# Altium PCB TX_Board.PcbDoc (part 2 of 5)
Units mm, origin at the board's own origin, x right, y up, seen from the top; angles counter-clockwise.
Board outline 69 x 69 mm, 4 copper layers (Top Layer, Int1 (GND), Int2 (GND), Bottom Layer), stack 1.591 mm thick; 102 components, 48 nets, 289 pads, 82 vias.
Unrouted connection lines stored in the file: 40.
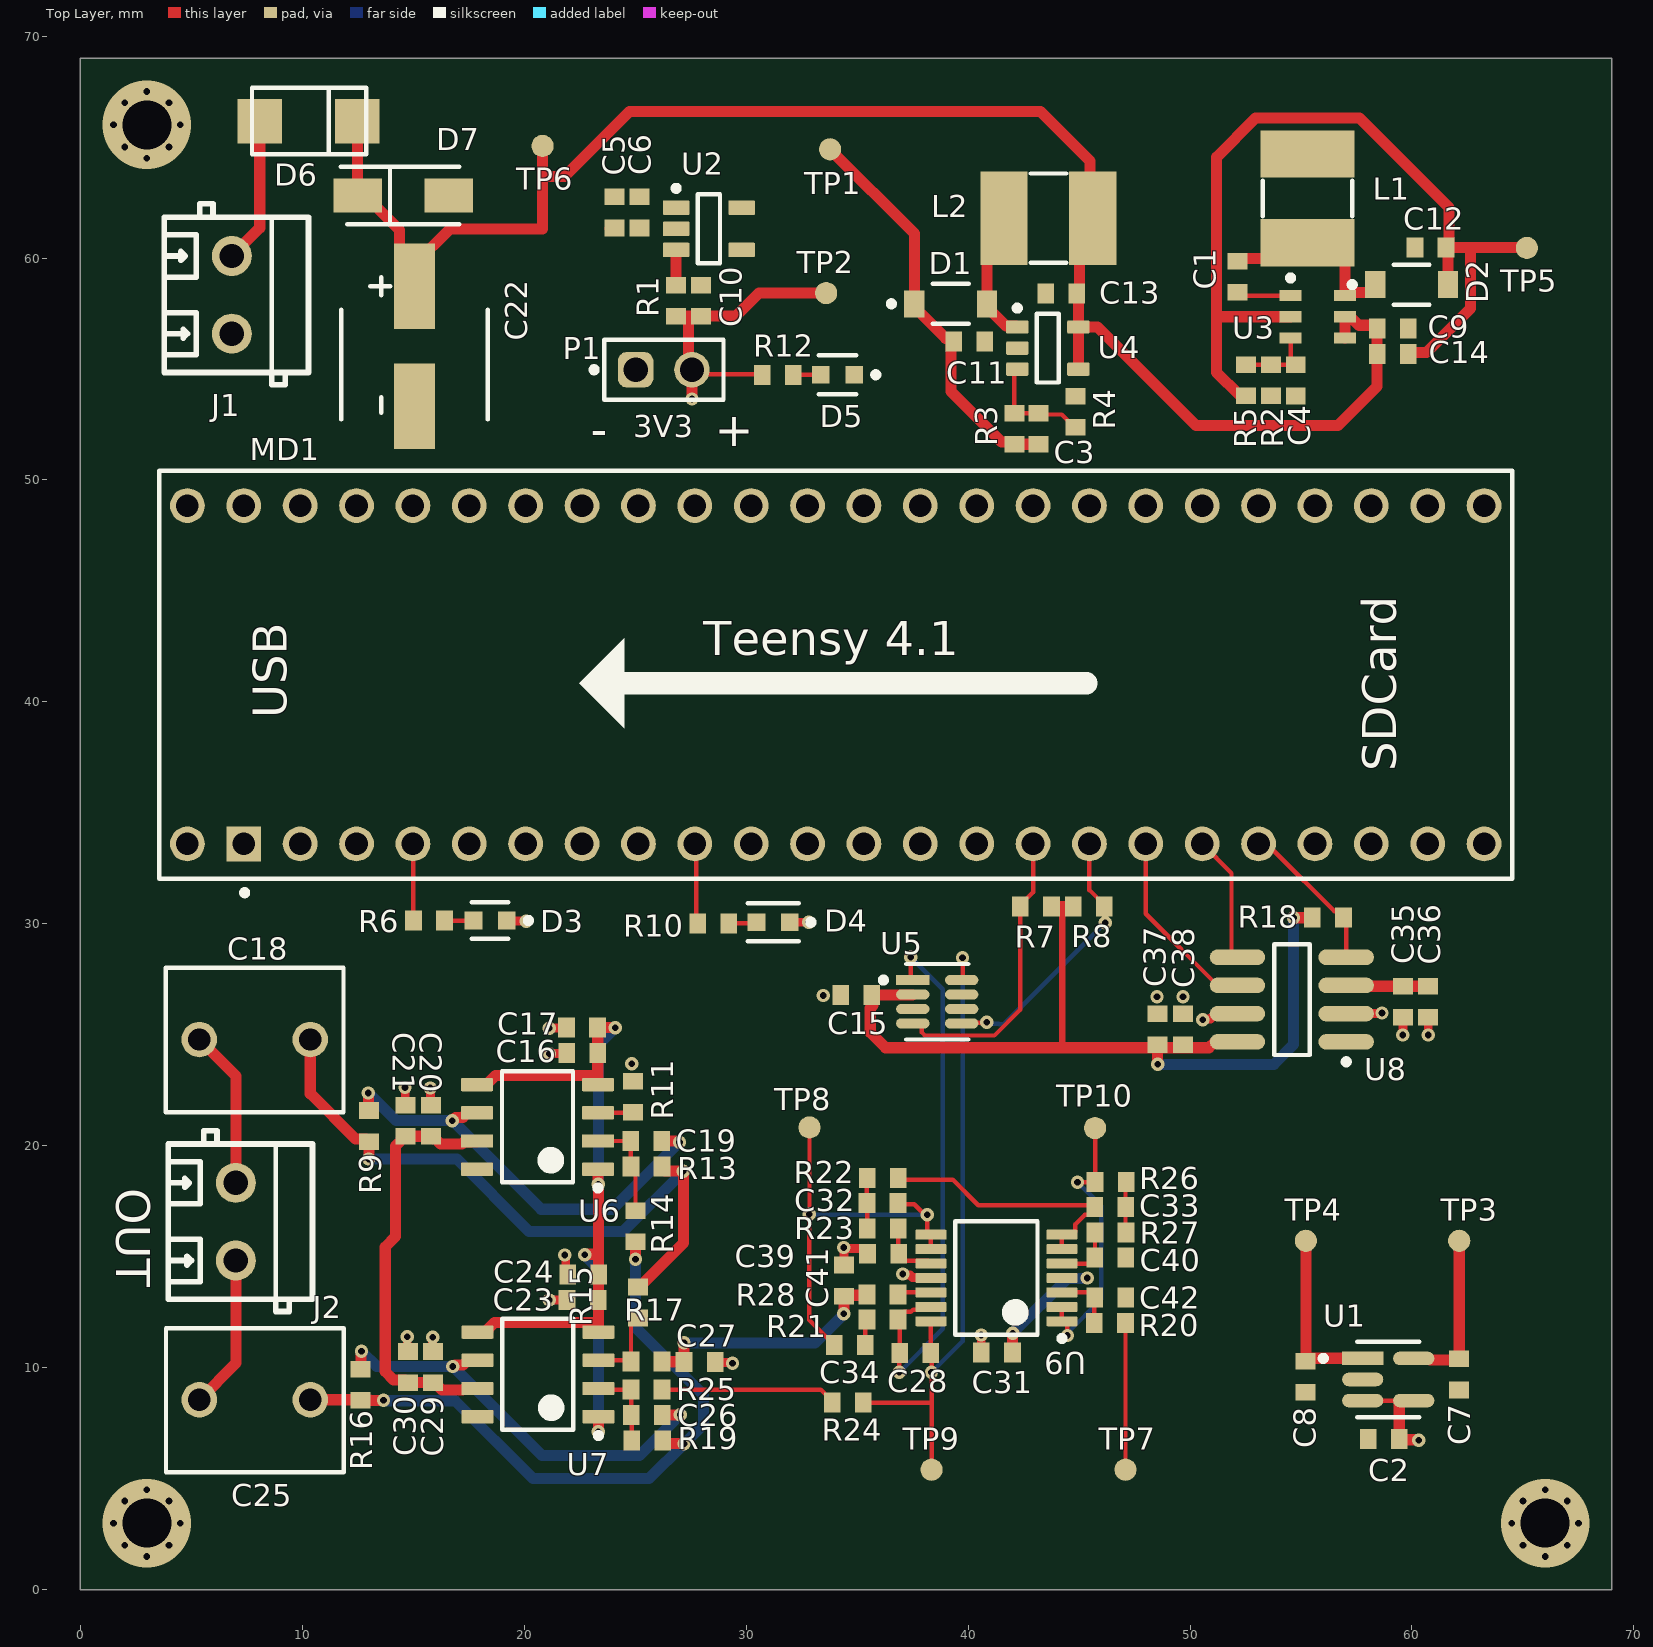
[diagram p0: Top Layer view]

## Part data (continued)
C19 C28: library part CC0603FRNPO9BN100, "50V 10pF NP0 ±1% 0603 Multilayer Ceramic Capacitors MLCC - SMD/SMT ROHS", Case Code (Imperial)=0603, Case Code (Metric)=1608, Dielectric=C0G, Dielectric Material=Ceramic, JLCPCB Part Number=C309467, Manufacturer="Yageo Group", Max Operating Temperature=125°C, Min Operating Temperature=-55°C, Temperature Coefficient=30ppm/°C, Tolerance=1%, Voltage Rating=50V, Case/Package=0603, Category="Ceramic Capacitors", China RoHS=Compliant, ComponentLink1Description=https://datasheet.octopart.com:443/CC0603FRNPO9BN100-Yageo-datasheet-182140217.pdf?src-supplier=IHS, ComponentLink1URL=https://datasheet.octopart.com:443/CC0603FRNPO9BN100-Yageo-datasheet-182140217.pdf?src-supplier=IHS, ComponentLink2Description=https://datasheet.octopart.com:443/CC0603FRNPO9BN100-Yageo-datasheet-151948684.pdf?src-supplier=element14+APAC, ComponentLink2URL=https://datasheet.octopart.com:443/CC0603FRNPO9BN100-Yageo-datasheet-151948684.pdf?src-supplier=element14+APAC, ComponentLink3Description=https://datasheet.octopart.com:443/CC0603FRNPO9BN100-Yageo-datasheet-65873193.pdf?src-supplier=element14+APAC, ComponentLink3URL=https://datasheet.octopart.com:443/CC0603FRNPO9BN100-Yageo-datasheet-65873193.pdf?src-supplier=element14+APAC, ComponentLink4Description=https://datasheet.octopart.com:443/CC0603FRNPO9BN100-Yageo-datasheet-10406438.pdf?src-supplier=Newark, ComponentLink4URL=https://datasheet.octopart.com:443/CC0603FRNPO9BN100-Yageo-datasheet-10406438.pdf?src-supplier=Newark, ComponentLink5Description=https://datasheet.octopart.com:443/CC0603FRNPO9BN100-Yageo-datasheet-181967871.pdf?src-supplier=Farnell, ComponentLink5URL=https://datasheet.octopart.com:443/CC0603FRNPO9BN100-Yageo-datasheet-181967871.pdf?src-supplier=Farnell, ComponentLink6Description=https://datasheet.octopart.com:443/CC0603FRNPO9BN100-Yageo-Group-datasheet-188689597.pdf?src-supplier=Farnell, ComponentLink6URL=https://datasheet.octopart.com:443/CC0603FRNPO9BN100-Yageo-Group-datasheet-188689597.pdf?src-supplier=Farnell, ComponentLink7Description=https://datasheet.octopart.com:443/CC0603FRNPO9BN100-Yageo-Group-datasheet-188129580.pdf?src-supplier=LCSC, ComponentLink7URL=https://datasheet.octopart.com:443/CC0603FRNPO9BN100-Yageo-Group-datasheet-188129580.pdf?src-supplier=LCSC, ComponentLink8Description=https://datasheet.octopart.com:443/CC0603FRNPO9BN100-Yageo-datasheet-137875056.pdf?src-supplier=Future+Electronics, ComponentLink8URL=https://datasheet.octopart.com:443/CC0603FRNPO9BN100-Yageo-datasheet-137875056.pdf?src-supplier=Future+Electronics, ComponentLink9Description=https://datasheet.octopart.com:443/CC0603FRNPO9BN100-Yageo-datasheet-136957424.pdf?src-supplier=Future+Electronics, ComponentLink9URL=https://datasheet.octopart.com:443/CC0603FRNPO9BN100-Yageo-datasheet-136957424.pdf?src-supplier=Future+Electronics, ComponentLink10Description=https://datasheet.octopart.com:443/CC0603FRNPO9BN100-Yageo-datasheet-137700082.pdf?src-supplier=Future+Electronics, ComponentLink10URL=https://datasheet.octopart.com:443/CC0603FRNPO9BN100-Yageo-datasheet-137700082.pdf?src-supplier=Future+Electronics, ComponentLink11Description=https://datasheet.octopart.com:443/CC0603FRNPO9BN100-Yageo-datasheet-78855684.pdf?src-supplier=Future+Electronics, ComponentLink11URL=https://datasheet.octopart.com:443/CC0603FRNPO9BN100-Yageo-datasheet-78855684.pdf?src-supplier=Future+Electronics, ComponentLink12Description=https://datasheet.octopart.com:443/CC0603FRNPO9BN100-Yageo-datasheet-16730043.pdf?src-supplier=Future+Electronics, ComponentLink12URL=https://datasheet.octopart.com:443/CC0603FRNPO9BN100-Yageo-datasheet-16730043.pdf?src-supplier=Future+Electronics, ComponentLink13Description=https://datasheet.octopart.com:443/CC0603FRNPO9BN100-Yageo-datasheet-15895757.pdf?src-supplier=Future+Electronics, ComponentLink13URL=https://datasheet.octopart.com:443/CC0603FRNPO9BN100-Yageo-datasheet-15895757.pdf?src-supplier=Future+Electronics, ComponentLink14Description=https://datasheet.octopart.com:443/CC0603FRNPO9BN100-Yageo-datasheet-12589826.pdf?src-supplier=Future+Electronics, ComponentLink14URL=https://datasheet.octopart.com:443/CC0603FRNPO9BN100-Yageo-datasheet-12589826.pdf?src-supplier=Future+Electronics, ComponentLink15Description=http://sigma.octopart.com:80/conflict_mineral_statement/Yageo-company-3.pdf?src-supplier=Compliance+Statements, ComponentLink15URL=http://sigma.octopart.com:80/conflict_mineral_statement/Yageo-company-3.pdf?src-supplier=Compliance+Statements, ComponentLink16Description=http://sigma.octopart.com:80/rohs_statement/Yageo-company-2.pdf?src-supplier=Compliance+Statements, ComponentLink16URL=http://sigma.octopart.com:80/rohs_statement/Yageo-company-2.pdf?src-supplier=Compliance+Statements, Composition=Ceramic, Depth=800µm, Dissipation Factor=1%, Halogen Free="Halogen Free", Height=800µm, Lead Free="Lead Free", Length=1.6mm, Lifecycle Status=Production, Manufacturer Part Number=CC0603FRNPO9BN100, Mounting Technology="Surface Mount", Number of Terminals=2, Packaging="Tape and Reel", Pins=2, Pricing="10=0.073, 11=0.0481, 20=0.072, 30=0.071, 50=0.069, 100=0.068, 101=0.0348, 250=0.055, 500=0.042, 501=0.03, 1000=0.038, 1001=0.0264 (USD)", Radiation Hardening=No, REACH SVHC=Unaffected, RoHS=Compliant, Schedule B="8532240020, 8532240020|8532240020|8532240020|8532240020|8532240020", Stock=69258, Supplier=Newark, Supplier Part Number=CC0603FRNPO9BN100, Termination=SMD/SMT, Thickness=889µm, Voltage Rating (DC)=50V, Width=800µm
C22: library part RVT1E101M0607, "Capacitor Polarised", JLCPCB Part Number=C72477, Manufacturer_Name=ROQANG, Datasheet Link=https://jlcpcb.com/partdetail/ROQANG-RVT1E101M0607/C72477, Height=8mm, Manufacturer_Part_Number=RVT1E101M0607
C26: library part CC0603CRNPO9BN4R7, "Surface Mount Ceramic Multilayer Capacitor 4.7pF 0.25pF C0G 50V 0603 Paper T/R", Case Code (Imperial)=0603, Case Code (Metric)=1608, Dielectric=C0G, Dielectric Material=Ceramic, Insulation Resistance=100GΩ, JLCPCB Part Number=C282071, Manufacturer="Yageo Group", Max Operating Temperature=125°C, Min Operating Temperature=-55°C, Temperature Coefficient=30ppm/°C, Voltage=50V, Case/Package=0603, Category="Ceramic Capacitors", China RoHS=Compliant, ComponentLink1Description=https://datasheet.octopart.com:443/CC0603CRNPO9BN4R7-Yageo-datasheet-182140217.pdf?src-supplier=IHS, ComponentLink1URL=https://datasheet.octopart.com:443/CC0603CRNPO9BN4R7-Yageo-datasheet-182140217.pdf?src-supplier=IHS, ComponentLink2Description=https://datasheet.octopart.com:443/CC0603CRNPO9BN4R7-Yageo-Group-datasheet-192360829.pdf?src-supplier=Future+Electronics, ComponentLink2URL=https://datasheet.octopart.com:443/CC0603CRNPO9BN4R7-Yageo-Group-datasheet-192360829.pdf?src-supplier=Future+Electronics, ComponentLink3Description=https://datasheet.octopart.com:443/CC0603CRNPO9BN4R7-Yageo-datasheet-5321569.pdf?src-supplier=Future+Electronics, ComponentLink3URL=https://datasheet.octopart.com:443/CC0603CRNPO9BN4R7-Yageo-datasheet-5321569.pdf?src-supplier=Future+Electronics, ComponentLink4Description=https://datasheet.octopart.com:443/CC0603CRNPO9BN4R7-Yageo-datasheet-137875056.pdf?src-supplier=Future+Electronics, ComponentLink4URL=https://datasheet.octopart.com:443/CC0603CRNPO9BN4R7-Yageo-datasheet-137875056.pdf?src-supplier=Future+Electronics, ComponentLink5Description=https://datasheet.octopart.com:443/CC0603CRNPO9BN4R7-Yageo-datasheet-136957424.pdf?src-supplier=Future+Electronics, ComponentLink5URL=https://datasheet.octopart.com:443/CC0603CRNPO9BN4R7-Yageo-datasheet-136957424.pdf?src-supplier=Future+Electronics, ComponentLink6Description=https://datasheet.octopart.com:443/CC0603CRNPO9BN4R7-Yageo-datasheet-137700082.pdf?src-supplier=Future+Electronics, ComponentLink6URL=https://datasheet.octopart.com:443/CC0603CRNPO9BN4R7-Yageo-datasheet-137700082.pdf?src-supplier=Future+Electronics, ComponentLink7Description=https://datasheet.octopart.com:443/CC0603CRNPO9BN4R7-Yageo-datasheet-78855684.pdf?src-supplier=Future+Electronics, ComponentLink7URL=https://datasheet.octopart.com:443/CC0603CRNPO9BN4R7-Yageo-datasheet-78855684.pdf?src-supplier=Future+Electronics, ComponentLink8Description=https://datasheet.octopart.com:443/CC0603CRNPO9BN4R7-Yageo-datasheet-62091628.pdf?src-supplier=Future+Electronics, ComponentLink8URL=https://datasheet.octopart.com:443/CC0603CRNPO9BN4R7-Yageo-datasheet-62091628.pdf?src-supplier=Future+Electronics, ComponentLink9Description=https://datasheet.octopart.com:443/CC0603CRNPO9BN4R7-Yageo-datasheet-24578986.pdf?src-supplier=Future+Electronics, ComponentLink9URL=https://datasheet.octopart.com:443/CC0603CRNPO9BN4R7-Yageo-datasheet-24578986.pdf?src-supplier=Future+Electronics, ComponentLink10Description=https://datasheet.octopart.com:443/CC0603CRNPO9BN4R7-Yageo-datasheet-16730043.pdf?src-supplier=Future+Electronics, ComponentLink10URL=https://datasheet.octopart.com:443/CC0603CRNPO9BN4R7-Yageo-datasheet-16730043.pdf?src-supplier=Future+Electronics, ComponentLink11Description=https://datasheet.octopart.com:443/CC0603CRNPO9BN4R7-Yageo-datasheet-15895757.pdf?src-supplier=Future+Electronics, ComponentLink11URL=https://datasheet.octopart.com:443/CC0603CRNPO9BN4R7-Yageo-datasheet-15895757.pdf?src-supplier=Future+Electronics, ComponentLink12Description=https://datasheet.octopart.com:443/CC0603CRNPO9BN4R7-Yageo-datasheet-12589826.pdf?src-supplier=Future+Electronics, ComponentLink12URL=https://datasheet.octopart.com:443/CC0603CRNPO9BN4R7-Yageo-datasheet-12589826.pdf?src-supplier=Future+Electronics, ComponentLink13Description=https://datasheet.octopart.com:443/CC0603CRNPO9BN4R7-Yageo-datasheet-8817079.pdf?src-supplier=Future+Electronics, ComponentLink13URL=https://datasheet.octopart.com:443/CC0603CRNPO9BN4R7-Yageo-datasheet-8817079.pdf?src-supplier=Future+Electronics, ComponentLink14Description=https://datasheet.octopart.com:443/CC0603CRNPO9BN4R7-Yageo-datasheet-8324240.pdf?src-supplier=Future+Electronics, ComponentLink14URL=https://datasheet.octopart.com:443/CC0603CRNPO9BN4R7-Yageo-datasheet-8324240.pdf?src-supplier=Future+Electronics, ComponentLink15Description=https://datasheet.octopart.com:443/CC0603CRNPO9BN4R7-Yageo-datasheet-504625.pdf?src-supplier=Future+Electronics, ComponentLink15URL=https://datasheet.octopart.com:443/CC0603CRNPO9BN4R7-Yageo-datasheet-504625.pdf?src-supplier=Future+Electronics, ComponentLink16Description=https://datasheet.octopart.com:443/CC0603CRNPO9BN4R7-Yageo-datasheet-10406438.pdf?src-supplier=element14+APAC, ComponentLink16URL=https://datasheet.octopart.com:443/CC0603CRNPO9BN4R7-Yageo-datasheet-10406438.pdf?src-supplier=element14+APAC, ComponentLink17Description=https://datasheet.octopart.com:443/CC0603CRNPO9BN4R7-Yageo-datasheet-65873193.pdf?src-supplier=element14+APAC, ComponentLink17URL=https://datasheet.octopart.com:443/CC0603CRNPO9BN4R7-Yageo-datasheet-65873193.pdf?src-supplier=element14+APAC, ComponentLink18Description=https://datasheet.octopart.com:443/CC0603CRNPO9BN4R7-Yageo-datasheet-181967803.pdf?src-supplier=Newark, ComponentLink18URL=https://datasheet.octopart.com:443/CC0603CRNPO9BN4R7-Yageo-datasheet-181967803.pdf?src-supplier=Newark, ComponentLink19Description=https://datasheet.octopart.com:443/CC0603CRNPO9BN4R7-Yageo-datasheet-151948684.pdf?src-supplier=Newark, ComponentLink19URL=https://datasheet.octopart.com:443/CC0603CRNPO9BN4R7-Yageo-datasheet-151948684.pdf?src-supplier=Newark, ComponentLink20Description=https://datasheet.octopart.com:443/CC0603CRNPO9BN4R7-Yageo-datasheet-67645495.pdf?src-supplier=Newark, ComponentLink20URL=https://datasheet.octopart.com:443/CC0603CRNPO9BN4R7-Yageo-datasheet-67645495.pdf?src-supplier=Newark, ComponentLink21Description=https://datasheet.octopart.com:443/CC0603CRNPO9BN4R7-Yageo-Group-datasheet-188129580.pdf?src-supplier=LCSC, ComponentLink21URL=https://datasheet.octopart.com:443/CC0603CRNPO9BN4R7-Yageo-Group-datasheet-188129580.pdf?src-supplier=LCSC, ComponentLink22Description=https://datasheet.octopart.com:443/CC0603CRNPO9BN4R7-Yageo-datasheet-10621397.pdf?src-supplier=Farnell, ComponentLink22URL=https://datasheet.octopart.com:443/CC0603CRNPO9BN4R7-Yageo-datasheet-10621397.pdf?src-supplier=Farnell, ComponentLink23Description=https://datasheet.octopart.com:443/CC0603CRNPO9BN4R7-Yageo-datasheet-8643175.pdf?src-supplier=SOS+electronic, ComponentLink23URL=https://datasheet.octopart.com:443/CC0603CRNPO9BN4R7-Yageo-datasheet-8643175.pdf?src-supplier=SOS+electronic, ComponentLink24Description=http://sigma.octopart.com:80/conflict_mineral_statement/Yageo-company-3.pdf?src-supplier=Compliance+Statements, ComponentLink24URL=http://sigma.octopart.com:80/conflict_mineral_statement/Yageo-company-3.pdf?src-supplier=Compliance+Statements, ComponentLink25Description=http://sigma.octopart.com:80/rohs_statement/Yageo-company-2.pdf?src-supplier=Compliance+Statements, ComponentLink25URL=http://sigma.octopart.com:80/rohs_statement/Yageo-company-2.pdf?src-supplier=Compliance+Statements, Composition=Ceramic, Country of Origin="Mainland China, Taiwan", Depth=800µm, Export Control Classification Number (ECCN) Code=EAR99, Halogen Free="Halogen Free", Harmonized Tariff Schedule (HTS) Code=8532.24.00.20, Height=800µm, Introduction Date=2009-04-16, Lead Free="Lead Free", Length=1.6mm, Lifecycle Status=Production, Manufacturer Part Number=CC0603CRNPO9BN4R7, Mounting Technology="Surface Mount", Number of Terminals=2, Packaging="Cut Tape", Pins=2, Pricing="4000=0.00724 (USD)", Radiation Hardening=No, REACH SVHC=Unaffected, RoHS=Compliant, Schedule B="8532240020, 8532240020|8532240020, 8532240020|8532240020|8532240020, 8532240020|8532240020|8532240020|8532240020", Stock=4000, Supplier=Avnet, Supplier Part Number=CC0603CRNPO9BN4R7, Termination=SMD/SMT, Thickness=889µm, Voltage Rating=50V, Voltage Rating (AC)=50V, Voltage Rating (DC)=50V, Weight=2.012816mg, Width=800µm
C32 C33: library part CC0603FRNPO9BN471, "50V 470pF NP0 ±1% 0603 Multilayer Ceramic Capacitors MLCC - SMD/SMT ROHS", Case Code (Imperial)=0603, Case Code (Metric)=1608, Dielectric=C0G, Dielectric Material=Ceramic, Insulation Resistance=10GΩ, JLCPCB Part Number=C519564, Manufacturer="Yageo Group", Max Operating Temperature=125°C, Min Operating Temperature=-55°C, Tolerance=1%, Voltage Rating=50V, Case/Package=0603, Category="Ceramic Capacitors", China RoHS=Compliant, ComponentLink1Description=https://datasheet.octopart.com:443/CC0603FRNPO9BN471-Yageo-datasheet-182140217.pdf?src-supplier=IHS, ComponentLink1URL=https://datasheet.octopart.com:443/CC0603FRNPO9BN471-Yageo-datasheet-182140217.pdf?src-supplier=IHS, ComponentLink2Description=https://datasheet.octopart.com:443/CC0603FRNPO9BN471-Yageo-datasheet-151948684.pdf?src-supplier=HQonline, ComponentLink2URL=https://datasheet.octopart.com:443/CC0603FRNPO9BN471-Yageo-datasheet-151948684.pdf?src-supplier=HQonline, ComponentLink3Description=https://datasheet.octopart.com:443/CC0603FRNPO9BN471-Yageo-datasheet-182029577.pdf?src-supplier=Newark, ComponentLink3URL=https://datasheet.octopart.com:443/CC0603FRNPO9BN471-Yageo-datasheet-182029577.pdf?src-supplier=Newark, ComponentLink4Description=https://datasheet.octopart.com:443/CC0603FRNPO9BN471-Yageo-datasheet-182029576.pdf?src-supplier=Newark, ComponentLink4URL=https://datasheet.octopart.com:443/CC0603FRNPO9BN471-Yageo-datasheet-182029576.pdf?src-supplier=Newark, ComponentLink5Description=https://datasheet.octopart.com:443/CC0603FRNPO9BN471-Yageo-Group-datasheet-188129580.pdf?src-supplier=LCSC, ComponentLink5URL=https://datasheet.octopart.com:443/CC0603FRNPO9BN471-Yageo-Group-datasheet-188129580.pdf?src-supplier=LCSC, ComponentLink6Description=https://datasheet.octopart.com:443/CC0603FRNPO9BN471-Yageo-datasheet-137875056.pdf?src-supplier=Future+Electronics, ComponentLink6URL=https://datasheet.octopart.com:443/CC0603FRNPO9BN471-Yageo-datasheet-137875056.pdf?src-supplier=Future+Electronics, ComponentLink7Description=https://datasheet.octopart.com:443/CC0603FRNPO9BN471-Yageo-datasheet-136957424.pdf?src-supplier=Future+Electronics, ComponentLink7URL=https://datasheet.octopart.com:443/CC0603FRNPO9BN471-Yageo-datasheet-136957424.pdf?src-supplier=Future+Electronics, ComponentLink8Description=https://datasheet.octopart.com:443/CC0603FRNPO9BN471-Yageo-datasheet-137700082.pdf?src-supplier=Future+Electronics, ComponentLink8URL=https://datasheet.octopart.com:443/CC0603FRNPO9BN471-Yageo-datasheet-137700082.pdf?src-supplier=Future+Electronics, ComponentLink9Description=https://datasheet.octopart.com:443/CC0603FRNPO9BN471-Yageo-datasheet-78855684.pdf?src-supplier=Future+Electronics, ComponentLink9URL=https://datasheet.octopart.com:443/CC0603FRNPO9BN471-Yageo-datasheet-78855684.pdf?src-supplier=Future+Electronics, ComponentLink10Description=https://datasheet.octopart.com:443/CC0603FRNPO9BN471-Yageo-datasheet-16730043.pdf?src-supplier=Future+Electronics, ComponentLink10URL=https://datasheet.octopart.com:443/CC0603FRNPO9BN471-Yageo-datasheet-16730043.pdf?src-supplier=Future+Electronics, ComponentLink11Description=https://datasheet.octopart.com:443/CC0603FRNPO9BN471-Yageo-datasheet-15895757.pdf?src-supplier=Future+Electronics, ComponentLink11URL=https://datasheet.octopart.com:443/CC0603FRNPO9BN471-Yageo-datasheet-15895757.pdf?src-supplier=Future+Electronics, ComponentLink12Description=https://datasheet.octopart.com:443/CC0603FRNPO9BN471-Yageo-datasheet-12589826.pdf?src-supplier=Future+Electronics, ComponentLink12URL=https://datasheet.octopart.com:443/CC0603FRNPO9BN471-Yageo-datasheet-12589826.pdf?src-supplier=Future+Electronics, ComponentLink13Description=https://datasheet.octopart.com:443/CC0603FRNPO9BN471-Yageo-datasheet-10406438.pdf?src-supplier=Future+Electronics, ComponentLink13URL=https://datasheet.octopart.com:443/CC0603FRNPO9BN471-Yageo-datasheet-10406438.pdf?src-supplier=Future+Electronics, ComponentLink14Description=http://sigma.octopart.com:80/conflict_mineral_statement/Yageo-company-3.pdf?src-supplier=Compliance+Statements, ComponentLink14URL=http://sigma.octopart.com:80/conflict_mineral_statement/Yageo-company-3.pdf?src-supplier=Compliance+Statements, ComponentLink15Description=http://sigma.octopart.com:80/rohs_statement/Yageo-company-2.pdf?src-supplier=Compliance+Statements, ComponentLink15URL=http://sigma.octopart.com:80/rohs_statement/Yageo-company-2.pdf?src-supplier=Compliance+Statements, Composition=Ceramic, Depth=800µm, Dissipation Factor=0.1%, Halogen Free="Halogen Free", Height=800µm, Lead Free="Lead Free", Length=1.6mm, Lifecycle Status=Production, Manufacturer Part Number=CC0603FRNPO9BN471, Mounting Technology="Surface Mount", Number of Terminals=2, Packaging="Tape and Reel", Pricing="1=0.0986, 11=0.0703, 101=0.0582, 501=0.0554, 1001=0.0547 (USD)", Radiation Hardening=No, REACH SVHC=Unaffected, RoHS=Compliant, Schedule B="8532240020, 8532240020|8532240020, 8532240020|8532240020|8532240020, 8532240020|8532240020|8532240020|8532240020", Stock=7080, Supplier=Newark, Supplier Part Number=CC0603FRNPO9BN471, Termination=SMD/SMT, Thickness=889µm, Voltage Rating (DC)=50V, Width=800µm
C34: library part CC0603JRX7R9BB103, "Surface Mount Ceramic Multilayer Capacitor 0.01uF 5% X7R 50V 0603 Paper T/R", Case Code (Imperial)=0603, Case Code (Metric)=1608, Dielectric=X7R, Dielectric Material=Ceramic, JLCPCB Part Number=C115056, Manufacturer="Yageo Group", Max Operating Temperature=125°C, Min Operating Temperature=-55°C, Tolerance=5%, Voltage Rating=50V, Case/Package=0603, Category="Ceramic Capacitors", China RoHS=Compliant, ComponentLink1Description=https://datasheet.octopart.com:443/CC0603JRX7R9BB103-Yageo-datasheet-177165144.pdf?src-supplier=IHS, ComponentLink1URL=https://datasheet.octopart.com:443/CC0603JRX7R9BB103-Yageo-datasheet-177165144.pdf?src-supplier=IHS, ComponentLink2Description=https://datasheet.octopart.com/CC0603JRX7R9BB103-Yageo-datasheet-10883670.pdf, ComponentLink2URL=https://datasheet.octopart.com/CC0603JRX7R9BB103-Yageo-datasheet-10883670.pdf, ComponentLink3Description=https://datasheet.octopart.com:443/CC0603JRX7R9BB103-Yageo-datasheet-147453679.pdf?src-supplier=Newark, ComponentLink3URL=https://datasheet.octopart.com:443/CC0603JRX7R9BB103-Yageo-datasheet-147453679.pdf?src-supplier=Newark, ComponentLink4Description=https://datasheet.octopart.com:443/CC0603JRX7R9BB103-Yageo-datasheet-140260305.pdf?src-supplier=Farnell, ComponentLink4URL=https://datasheet.octopart.com:443/CC0603JRX7R9BB103-Yageo-datasheet-140260305.pdf?src-supplier=Farnell, ComponentLink5Description=https://datasheet.octopart.com:443/CC0603JRX7R9BB103-Yageo-datasheet-181968368.pdf?src-supplier=Farnell, ComponentLink5URL=https://datasheet.octopart.com:443/CC0603JRX7R9BB103-Yageo-datasheet-181968368.pdf?src-supplier=Farnell, ComponentLink6Description=https://datasheet.octopart.com:443/CC0603JRX7R9BB103-Yageo-datasheet-62336348.pdf?src-supplier=element14+APAC, ComponentLink6URL=https://datasheet.octopart.com:443/CC0603JRX7R9BB103-Yageo-datasheet-62336348.pdf?src-supplier=element14+APAC, ComponentLink7Description=https://datasheet.octopart.com:443/CC0603JRX7R9BB103-Yageo-datasheet-499490.pdf?src-supplier=element14, ComponentLink7URL=https://datasheet.octopart.com:443/CC0603JRX7R9BB103-Yageo-datasheet-499490.pdf?src-supplier=element14, ComponentLink8Description=https://datasheet.octopart.com:443/CC0603JRX7R9BB103-Yageo-datasheet-8701427.pdf?src-supplier=element14, ComponentLink8URL=https://datasheet.octopart.com:443/CC0603JRX7R9BB103-Yageo-datasheet-8701427.pdf?src-supplier=element14, ComponentLink9Description=https://datasheet.octopart.com:443/CC0603JRX7R9BB103-Yageo-datasheet-5301394.pdf?src-supplier=element14, ComponentLink9URL=https://datasheet.octopart.com:443/CC0603JRX7R9BB103-Yageo-datasheet-5301394.pdf?src-supplier=element14, ComponentLink10Description=https://datasheet.octopart.com:443/CC0603JRX7R9BB103-Yageo-datasheet-166511530.pdf?src-supplier=Future+Electronics, ComponentLink10URL=https://datasheet.octopart.com:443/CC0603JRX7R9BB103-Yageo-datasheet-166511530.pdf?src-supplier=Future+Electronics, ComponentLink11Description=https://datasheet.octopart.com:443/CC0603JRX7R9BB103-Yageo-datasheet-137700082.pdf?src-supplier=Future+Electronics, ComponentLink11URL=https://datasheet.octopart.com:443/CC0603JRX7R9BB103-Yageo-datasheet-137700082.pdf?src-supplier=Future+Electronics, ComponentLink12Description=https://datasheet.octopart.com:443/CC0603JRX7R9BB103-Yageo-datasheet-137700084.pdf?src-supplier=Future+Electronics, ComponentLink12URL=https://datasheet.octopart.com:443/CC0603JRX7R9BB103-Yageo-datasheet-137700084.pdf?src-supplier=Future+Electronics, ComponentLink13Description=https://datasheet.octopart.com:443/CC0603JRX7R9BB103-Yageo-datasheet-27626582.pdf?src-supplier=Future+Electronics, ComponentLink13URL=https://datasheet.octopart.com:443/CC0603JRX7R9BB103-Yageo-datasheet-27626582.pdf?src-supplier=Future+Electronics, ComponentLink14Description=https://datasheet.octopart.com:443/CC0603JRX7R9BB103-Yageo-datasheet-15895757.pdf?src-supplier=Future+Electronics, ComponentLink14URL=https://datasheet.octopart.com:443/CC0603JRX7R9BB103-Yageo-datasheet-15895757.pdf?src-supplier=Future+Electronics, ComponentLink15Description=https://datasheet.octopart.com:443/CC0603JRX7R9BB103-Yageo-datasheet-12526321.pdf?src-supplier=Future+Electronics, ComponentLink15URL=https://datasheet.octopart.com:443/CC0603JRX7R9BB103-Yageo-datasheet-12526321.pdf?src-supplier=Future+Electronics, ComponentLink16Description=https://datasheet.octopart.com:443/CC0603JRX7R9BB103-Yageo-Group-datasheet-165992755.pdf?src-supplier=ODG+(Origin+Data+Global), ComponentLink16URL=https://datasheet.octopart.com:443/CC0603JRX7R9BB103-Yageo-Group-datasheet-165992755.pdf?src-supplier=ODG+(Origin+Data+Global), ComponentLink17Description=https://datasheet.octopart.com:443/CC0603JRX7R9BB103-Yageo-datasheet-151948686.pdf?src-supplier=TME, ComponentLink17URL=https://datasheet.octopart.com:443/CC0603JRX7R9BB103-Yageo-datasheet-151948686.pdf?src-supplier=TME, ComponentLink18Description=http://sigma.octopart.com:80/conflict_mineral_statement/Yageo-company-3.pdf?src-supplier=Compliance+Statements, ComponentLink18URL=http://sigma.octopart.com:80/conflict_mineral_statement/Yageo-company-3.pdf?src-supplier=Compliance+Statements, ComponentLink19Description=http://sigma.octopart.com:80/rohs_statement/Yageo-company-2.pdf?src-supplier=Compliance+Statements, ComponentLink19URL=http://sigma.octopart.com:80/rohs_statement/Yageo-company-2.pdf?src-supplier=Compliance+Statements, Composition=Ceramic, Depth=800µm, Halogen Free="Halogen Free", Height=800µm, Lead Free="Lead Free", Length=1.6mm, Lifecycle Status=Production, Manufacturer Part Number=CC0603JRX7R9BB103, Mounting Technology="Surface Mount", Number of Terminals=2, Pins=2, Pricing="10=0.03, 20=0.029, 30=0.028, 50=0.027, 100=0.026, 250=0.023, 500=0.019, 1000=0.017 (USD)", Radiation Hardening=No, REACH SVHC=Unaffected, RoHS=Compliant, Schedule B="8532240020, 8532240020|8532240020, 8532240020|8532240020|8532240020, 8532240020|8532240020|8532240020|8532240020", Stock=32119, Supplier=Newark, Supplier Part Number=CC0603JRX7R9BB103, Termination=SMD/SMT, Thickness=889µm, Voltage Rating (DC)=50V, Width=800µm
C39 C40 C42: library part CC0603FRNPO9BN470, "Surface Mount Ceramic Multilayer Capacitor 47pF 1% C0G 50V 0603 Paper T/R", Case Code (Imperial)=0603, Case Code (Metric)=1608, Dielectric=C0G, Dielectric Material=Ceramic, JLCPCB Part Number=C519486, Manufacturer="Yageo Group", Max Operating Temperature=125°C, Min Operating Temperature=-55°C, Temperature Coefficient=30ppm/°C, Tolerance=1%, Voltage=50V, Case/Package=0603, Category="Ceramic Capacitors", China RoHS=Compliant, ComponentLink1Description=https://datasheet.octopart.com:443/CC0603FRNPO9BN470-Yageo-datasheet-182140217.pdf?src-supplier=IHS, ComponentLink1URL=https://datasheet.octopart.com:443/CC0603FRNPO9BN470-Yageo-datasheet-182140217.pdf?src-supplier=IHS, ComponentLink2Description=https://datasheet.octopart.com:443/CC0603FRNPO9BN470-Yageo-datasheet-151948684.pdf?src-supplier=element14+APAC, ComponentLink2URL=https://datasheet.octopart.com:443/CC0603FRNPO9BN470-Yageo-datasheet-151948684.pdf?src-supplier=element14+APAC, ComponentLink3Description=https://datasheet.octopart.com:443/CC0603FRNPO9BN470-Yageo-datasheet-65873193.pdf?src-supplier=element14+APAC, ComponentLink3URL=https://datasheet.octopart.com:443/CC0603FRNPO9BN470-Yageo-datasheet-65873193.pdf?src-supplier=element14+APAC, ComponentLink4Description=https://datasheet.octopart.com:443/CC0603FRNPO9BN470-Yageo-datasheet-182029575.pdf?src-supplier=Farnell, ComponentLink4URL=https://datasheet.octopart.com:443/CC0603FRNPO9BN470-Yageo-datasheet-182029575.pdf?src-supplier=Farnell, ComponentLink5Description=https://datasheet.octopart.com:443/CC0603FRNPO9BN470-Yageo-datasheet-182029574.pdf?src-supplier=Farnell, ComponentLink5URL=https://datasheet.octopart.com:443/CC0603FRNPO9BN470-Yageo-datasheet-182029574.pdf?src-supplier=Farnell, ComponentLink6Description=https://datasheet.octopart.com:443/CC0603FRNPO9BN470-Yageo-datasheet-10406438.pdf?src-supplier=Newark, ComponentLink6URL=https://datasheet.octopart.com:443/CC0603FRNPO9BN470-Yageo-datasheet-10406438.pdf?src-supplier=Newark, ComponentLink7Description=https://datasheet.octopart.com:443/CC0603FRNPO9BN470-Yageo-Group-datasheet-189192896.pdf?src-supplier=TME, ComponentLink7URL=https://datasheet.octopart.com:443/CC0603FRNPO9BN470-Yageo-Group-datasheet-189192896.pdf?src-supplier=TME, ComponentLink8Description=https://datasheet.octopart.com:443/CC0603FRNPO9BN470-Yageo-Group-datasheet-188129580.pdf?src-supplier=LCSC, ComponentLink8URL=https://datasheet.octopart.com:443/CC0603FRNPO9BN470-Yageo-Group-datasheet-188129580.pdf?src-supplier=LCSC, ComponentLink9Description=https://datasheet.octopart.com:443/CC0603FRNPO9BN470-Yageo-datasheet-137875056.pdf?src-supplier=Future+Electronics, ComponentLink9URL=https://datasheet.octopart.com:443/CC0603FRNPO9BN470-Yageo-datasheet-137875056.pdf?src-supplier=Future+Electronics, ComponentLink10Description=https://datasheet.octopart.com:443/CC0603FRNPO9BN470-Yageo-datasheet-136957424.pdf?src-supplier=Future+Electronics, ComponentLink10URL=https://datasheet.octopart.com:443/CC0603FRNPO9BN470-Yageo-datasheet-136957424.pdf?src-supplier=Future+Electronics, ComponentLink11Description=https://datasheet.octopart.com:443/CC0603FRNPO9BN470-Yageo-datasheet-137700082.pdf?src-supplier=Future+Electronics, ComponentLink11URL=https://datasheet.octopart.com:443/CC0603FRNPO9BN470-Yageo-datasheet-137700082.pdf?src-supplier=Future+Electronics, ComponentLink12Description=https://datasheet.octopart.com:443/CC0603FRNPO9BN470-Yageo-datasheet-78855684.pdf?src-supplier=Future+Electronics, ComponentLink12URL=https://datasheet.octopart.com:443/CC0603FRNPO9BN470-Yageo-datasheet-78855684.pdf?src-supplier=Future+Electronics, ComponentLink13Description=https://datasheet.octopart.com:443/CC0603FRNPO9BN470-Yageo-datasheet-16730043.pdf?src-supplier=Future+Electronics, ComponentLink13URL=https://datasheet.octopart.com:443/CC0603FRNPO9BN470-Yageo-datasheet-16730043.pdf?src-supplier=Future+Electronics, ComponentLink14Description=https://datasheet.octopart.com:443/CC0603FRNPO9BN470-Yageo-datasheet-12589826.pdf?src-supplier=Future+Electronics, ComponentLink14URL=https://datasheet.octopart.com:443/CC0603FRNPO9BN470-Yageo-datasheet-12589826.pdf?src-supplier=Future+Electronics, ComponentLink15Description=https://datasheet.octopart.com:443/CC0603FRNPO9BN470-Yageo-datasheet-8817079.pdf?src-supplier=Future+Electronics, ComponentLink15URL=https://datasheet.octopart.com:443/CC0603FRNPO9BN470-Yageo-datasheet-8817079.pdf?src-supplier=Future+Electronics, ComponentLink16Description=https://datasheet.octopart.com:443/CC0603FRNPO9BN470-Yageo-datasheet-8324240.pdf?src-supplier=Future+Electronics, ComponentLink16URL=https://datasheet.octopart.com:443/CC0603FRNPO9BN470-Yageo-datasheet-8324240.pdf?src-supplier=Future+Electronics, ComponentLink17Description=https://datasheet.octopart.com:443/CC0603FRNPO9BN470-Yageo-datasheet-504625.pdf?src-supplier=Future+Electronics, ComponentLink17URL=https://datasheet.octopart.com:443/CC0603FRNPO9BN470-Yageo-datasheet-504625.pdf?src-supplier=Future+Electronics, ComponentLink18Description=https://datasheet.octopart.com:443/CC0603FRNPO9BN470-Yageo-datasheet-5321569.pdf?src-supplier=Future+Electronics, ComponentLink18URL=https://datasheet.octopart.com:443/CC0603FRNPO9BN470-Yageo-datasheet-5321569.pdf?src-supplier=Future+Electronics, ComponentLink19Description=http://sigma.octopart.com:80/conflict_mineral_statement/Yageo-company-3.pdf?src-supplier=Compliance+Statements, ComponentLink19URL=http://sigma.octopart.com:80/conflict_mineral_statement/Yageo-company-3.pdf?src-supplier=Compliance+Statements, ComponentLink20Description=http://sigma.octopart.com:80/rohs_statement/Yageo-company-2.pdf?src-supplier=Compliance+Statements, ComponentLink20URL=http://sigma.octopart.com:80/rohs_statement/Yageo-company-2.pdf?src-supplier=Compliance+Statements, Composition=Ceramic, Depth=800µm, Halogen Free="Halogen Free", Height=800µm, Lead Free="Lead Free", Length=1.6mm, Lifecycle Status=Production, Manufacturer Part Number=CC0603FRNPO9BN470, Mounting Technology="Surface Mount", Number of Terminals=2, Pins=2, Pricing="1=0.164, 25=0.068, 100=0.06, 250=0.053, 500=0.046, 1000=0.042, 2500=0.036, 5000=0.03 (USD)", Radiation Hardening=No, REACH SVHC=Unaffected, RoHS=Compliant, Schedule B="8532240020, 8532240020|8532240020, 8532240020|8532240020|8532240020, 8532240020|8532240020|8532240020|8532240020", Stock=37203, Supplier=Newark, Supplier Part Number=CC0603FRNPO9BN470, Termination=SMD/SMT, Thickness=889µm, Voltage Rating=50V, Voltage Rating (DC)=50V, Width=800µm
D1 D2: library part CMP-2000-05114-2, "DIODE SCHOTTKY 40V 500MA SOD123", Average Rectified Current=500mA, Current Rating=500A, Forward Voltage=620mV, JLCPCB Part Number=C21353, Max Forward Surge Current (Ifsm)=5.5A, Max Operating Temperature=125°C, Max Repetitive Reverse Voltage (Vrrm)=40V, Max Reverse Leakage Current=20uA, Min Operating Temperature=-65°C, Package Quantity=3000, Power Dissipation=400mW, Contact Plating=Tin, Element Configuration=Single, Forward Current=500mA, Height=1.03mm, Lead Free="Lead Free", Length=2.7mm, Max Reverse Voltage (DC)=40V, Max Surge Current=5.5A, Mount="Surface Mount", Number of Pins=2, Output Current=500mA, Packaging="Tape and Reel", Peak Non-Repetitive Surge Current=5.5A, Peak Reverse Current=20uA, Polarity=Standard, Radiation Hardening=No, REACH SVHC="No SVHC", Voltage Rating (DC)=40V, Weight=0.03g, Width=1.6mm
D3: library part CMP-1674-00011-2, "LED RED CLEAR CHIP SMD", Case Code (Imperial)=0603, Case Code (Metric)=1608, Color=Red, Forward Current=30mA, Forward Voltage=2.4V, JLCPCB Part Number=C94869, Lens Color=Colorless, Max Operating Temperature=85°C, Min Operating Temperature=-55°C, Package Quantity=1, Power Dissipation=75mW, Reverse Voltage=5V, Test Current=20mA, Case/Package=0603, Depth=0.8mm, Dominant Wavelength=631nm, Height=0.8mm, Illumination Color=Red, Lead Free="Lead Free", Length=1.6mm, Lens Style=Diffused, Lens Transparency=Clear, Luminous Intensity=54mcd, Mount="Surface Mount", Number of Elements=1, Number of LEDs=1, Number of Pins=2, Packaging="Tape and Reel", Power Rating=75mW, Radiation Hardening=No, Viewing Angle=130°, Wavelength=639nm, Width=0.8mm
D4: library part CMP-1674-00008-9, "LED ORANGE CLEAR CHIP SMD", Case Code (Imperial)=0603, Case Code (Metric)=1608, Color=Orange, Forward Current=30mA, Forward Voltage=2V, JLCPCB Part Number=C157740, Lens Color=Colorless, Max Operating Temperature=85°C, Min Operating Temperature=-55°C, Package Quantity=3000, Power Dissipation=75mW, Reverse Voltage=5V, Test Current=20mA, Case/Package=0603, Depth=1.6mm, Dominant Wavelength=605nm, Height=0.9mm, Illumination Color=Orange, Lead Free="Lead Free", Length=3.2mm, Lens Size=0.8mm, Lens Style=Flat, Lens Transparency=Clear, Luminous Intensity=90mcd, Mount="Surface Mount", Number of Elements=1, Number of LEDs=1, Number of Pins=2, Packaging="Tape and Reel", Power Rating=75mW, Radiation Hardening=No, RoHS Compliant=Yes, Series=-, Viewing Angle=130°, Wavelength=611nm, Width=0.8mm
D5: library part CMP-2000-05197-2, "LED GREEN CLEAR CHIP SMD", Case Code (Imperial)=0603, Case Code (Metric)=1608, Color=Green, Forward Current=30mA, Forward Voltage=2V, JLCPCB Part Number=C125094, Lens Color=Colorless, Max Operating Temperature=85°C, Min Operating Temperature=-55°C, Package Quantity=1, Power Dissipation=75mW, Reverse Voltage=5V, Test Current=20mA, Case/Package=0603, Depth=0.8mm, Dominant Wavelength=571nm, Height=0.8mm, Illumination Color=Green, Lead Free="Lead Free", Length=1.6mm, Lens Style=Diffused, Lens Transparency=Clear, Luminous Intensity=35mcd, Mount="Surface Mount", Number of Elements=1, Number of LEDs=1, Number of Pins=2, Packaging="Tape and Reel", Power Rating=75mW, Radiation Hardening=No, Viewing Angle=130°, Wavelength=574nm, Width=0.8mm
D6: "-55℃~+125℃ 3A 40V 500uA@40V 550mV@3A Independent SMA(DO-214AC) Schottky Diodes ROHS", JLCPCB Part Number=C8678, Manufacturer=MDD, Category="Schottky Diodes", Manufacturer Part Number=SS34
D7: "SMAJ Series 24.4 V 400 W Surface Mount Uni-Directional TVS Diode - DO-214AC", Breakdown Voltage=17.6V, Clamping Voltage=24.4V, Forward Voltage=3.5V, JLCPCB Part Number=C148216, Leakage Current=1µA, Manufacturer=Littelfuse, Max Breakdown Voltage=18.5V, Max Junction Temperature (Tj)=150°C, Max Power Dissipation=3.3W, Max Surge Current=16.4A, Min Breakdown Voltage=16.7V, Min Operating Temperature=-65°C, Operating Supply Voltage=15V, Peak Pulse Power=400W, Power Line Protection=No, Test Current=1mA, Category="TVS Diodes", ComponentLink1Description=https://datasheet.octopart.com:443/SMAJ15A-Littelfuse-datasheet-150463581.pdf?src-supplier=Farnell, ComponentLink1URL=https://datasheet.octopart.com:443/SMAJ15A-Littelfuse-datasheet-150463581.pdf?src-supplier=Farnell, ComponentLink2Description=https://datasheet.octopart.com:443/SMAJ15A-Littelfuse-datasheet-63710798.pdf?src-supplier=Farnell, ComponentLink2URL=https://datasheet.octopart.com:443/SMAJ15A-Littelfuse-datasheet-63710798.pdf?src-supplier=Farnell, ComponentLink3Description=https://datasheet.octopart.com:443/SMAJ15A-Littelfuse-datasheet-11547152.pdf?src-supplier=element14+APAC, ComponentLink3URL=https://datasheet.octopart.com:443/SMAJ15A-Littelfuse-datasheet-11547152.pdf?src-supplier=element14+APAC, ComponentLink4Description=https://datasheet.octopart.com:443/SMAJ15A-Littelfuse-datasheet-5393952.pdf?src-supplier=element14+APAC, ComponentLink4URL=https://datasheet.octopart.com:443/SMAJ15A-Littelfuse-datasheet-5393952.pdf?src-supplier=element14+APAC, ComponentLink5Description=https://datasheet.octopart.com:443/SMAJ15A-Littelfuse-datasheet-511791.pdf?src-supplier=element14+APAC, ComponentLink5URL=https://datasheet.octopart.com:443/SMAJ15A-Littelfuse-datasheet-511791.pdf?src-supplier=element14+APAC, ComponentLink6Description=https://datasheet.octopart.com:443/SMAJ15A-Littelfuse-datasheet-1053.pdf?src-supplier=DigiKey, ComponentLink6URL=https://datasheet.octopart.com:443/SMAJ15A-Littelfuse-datasheet-1053.pdf?src-supplier=DigiKey, ComponentLink7Description=https://datasheet.octopart.com:443/SMAJ15A-Littelfuse-datasheet-164649624.pdf?src-supplier=JRH+Electronics, ComponentLink7URL=https://datasheet.octopart.com:443/SMAJ15A-Littelfuse-datasheet-164649624.pdf?src-supplier=JRH+Electronics, ComponentLink8Description=https://datasheet.octopart.com:443/SMAJ15A-Littelfuse-datasheet-38878911.pdf?src-supplier=RS+(Formerly+Allied+Electronics), ComponentLink8URL=https://datasheet.octopart.com:443/SMAJ15A-Littelfuse-datasheet-38878911.pdf?src-supplier=RS+(Formerly+Allied+Electronics), ComponentLink9Description=https://datasheet.octopart.com:443/SMAJ15A-Littelfuse-datasheet-17901671.pdf?src-supplier=Future+Electronics, ComponentLink9URL=https://datasheet.octopart.com:443/SMAJ15A-Littelfuse-datasheet-17901671.pdf?src-supplier=Future+Electronics, Composition=Zener, Country of Origin="Mainland China", Direction=Unidirectional, Element Configuration=Single, Export Control Classification Number (ECCN) Code=EAR99, Harmonized Tariff Schedule (HTS) Code=8541.10.00.50, Height=2.29mm, Introduction Date=2003-11-20, Lead Free="Lead Free", Length=4.5mm, Lifecycle Status=Production, Manufacturer Part Number=SMAJ15A, Max Operating Temperature=150°C, Max Reverse Leakage Current=1µA, Mounting Technology="Surface Mount", Number of Channels=1, Number of Elements=1, Number of Terminals=2, Number of Unidirectional Channels=1, Packaging="Tape & Reel", Peak Pulse Current=16.4A, Peak Reverse Current=1µA, Pins=2, Polarity=Unidirectional, Power Dissipation=400W, Power Rating=400W, Pricing="5000=0.0662, 10000=0.0652, 15000=0.0646, 25000=0.0638, 50000=0.0622 (USD)", Radiation Hardening=No, REACH SVHC=Affected, Reverse Breakdown Voltage=16.7V, Reverse Standoff Voltage=15V, Reverse Voltage=15V, RoHS=Compliant, Schedule B="8541100080, 8541100080|8541100080|8541100080|8541100080|8541100080", Stock=635000, Supplier="Future Electronics", Supplier Part Number=SMAJ15A, Termination=SMD/SMT, Voltage Rating (DC)=15V, Width=2.79mm
J1 J2: "-40℃~+105℃ 0.5~1 1 18~24 1x2P 2 2P 3.5mm 300V 7A 8.5mm Green M2 Through Hole Plugin,P=3.5mm Screw Terminal Blocks ROHS", JLCPCB Part Number=C695629
L1: library part SWPA5040S220MT, "General Purpose Inductor, 22uH, 20%, 1 Element, Ferrite-Core, SMD, 2020", Case/Package=2020, DC Resistance (DCR)=168mΩ, JLCPCB Part Number=C68434, Manufacturer=Sunlord, Max Current Rating=1.5A, Max Operating Temperature=125°C, Min Operating Temperature=-40°C, Self Resonant Frequency=11MHz, Supplier Part Number=3442-SWPA5040S220MTCT-ND, Test Frequency=100kHz, Tolerance=20%, Category="Fixed Inductors", ComponentLink1Description=https://datasheet.octopart.com:443/SWPA5040S220MT-Sunlord-datasheet-180747130.pdf?src-supplier=IHS, ComponentLink1URL=https://datasheet.octopart.com:443/SWPA5040S220MT-Sunlord-datasheet-180747130.pdf?src-supplier=IHS, Core Material=Ferrite, Height=4mm, Length=5mm, Lifecycle Status=Production, Manufacturer Part Number=SWPA5040S220MT, Number of Circuits=1, Number of Terminals=2, Pricing="1=0.47, 10=0.384, 100=0.3156 (USD)", REACH SVHC=Unaffected, RoHS=Compliant, Shielding=Shielded, Stock=352, Supplier=DigiKey, Width=5mm
L2: library part SWPA5040S100MT, "General Purpose Inductor, 10uH, 20%, 1 Element, Ferrite-Core, SMD, 2020", Case/Package=2020, DC Resistance (DCR)=83mΩ, JLCPCB Part Number=C84608, Manufacturer=Sunlord, Max Current Rating=2.1A, Max Operating Temperature=125°C, Min Operating Temperature=-40°C, Self Resonant Frequency=18MHz, Supplier Part Number=3442-SWPA5040S100MTCT-ND, Test Frequency=100kHz, Tolerance=20%, Category="Fixed Inductors", ComponentLink1Description=https://datasheet.octopart.com:443/SWPA5040S100MT-Sunlord-datasheet-180747130.pdf?src-supplier=IHS, ComponentLink1URL=https://datasheet.octopart.com:443/SWPA5040S100MT-Sunlord-datasheet-180747130.pdf?src-supplier=IHS, Core Material=Ferrite, Height=4mm, Length=5mm, Lifecycle Status=Production, Manufacturer Part Number=SWPA5040S100MT, Number of Circuits=1, Number of Terminals=2, Pricing="1=0.47, 10=0.384, 100=0.3156 (USD)", REACH SVHC=Unaffected, RoHS=Compliant, Shielding=Shielded, Stock=768, Supplier=DigiKey, Width=5mm
MD1: library part CMP-157412-000001-1, "TEENSY 4.1 (HEADERS)"
P1: library part CMP-1712-00002-7, "THT Vertical Pin Header WR-PHD, Pitch 2.54 mm, Single Row, 2 pins", Color=Black, Contact Resistance=20mΩ, Current Rating=3A, Max Operating Temperature=105°C, Min Operating Temperature=-40°C, Operating Supply Voltage=250V, Connector Type="Male Pin", Contact Gender=Male, Contact Material=Gold, Contact Mating Length=5.9944mm, Contact Plating=Gold, Gender=Male, Height=8.94mm, Housing Material=PBT, Lead Free="Lead Free", Lead Pitch=2.54mm, Mount="Through Hole", Number of Contacts=2, Number of Pins=2, Number of Positions=2, Number of Rows=1, Orientation=Vertical, Packaging=Bulk, Pitch=2.54mm, REACH SVHC=No, RoHS=Compliant, Termination="Through Hole", Voltage Rating=250V
R1 R9 R16 R20 R24: library part RC0603FR-070RL, "Zero Ohm Resistor, Jumper, 0603 [1608 Metric], Thick Film, 100 mW, 1 A, Surface Mount", Case Code (Imperial)=0603, Current Rating=1A, JLCPCB Part Number=C100044, Manufacturer="Yageo Group", Max Operating Temperature=155°C, Max Power Dissipation=100mW, Min Operating Temperature=-55°C, Temperature Coefficient=200ppm/°C, Tolerance=1%, Voltage Rating=75V, Voltage Rating (DC)=50V, Case/Package=0603, Category="Chip SMD Resistors", China RoHS=Non-Compliant, ComponentLink1Description=https://datasheet.octopart.com:443/RC0603FR-070RL-Yageo-datasheet-127823281.pdf?src-supplier=Upverter, ComponentLink1URL=https://datasheet.octopart.com:443/RC0603FR-070RL-Yageo-datasheet-127823281.pdf?src-supplier=Upverter, ComponentLink2Description=https://datasheet.octopart.com:443/RC0603FR-070RL-Yageo-datasheet-30459151.pdf?src-supplier=IHS, ComponentLink2URL=https://datasheet.octopart.com:443/RC0603FR-070RL-Yageo-datasheet-30459151.pdf?src-supplier=IHS, ComponentLink3Description=https://datasheet.octopart.com:443/RC0603FR-070RL-Yageo-datasheet-8328172.pdf?src-supplier=element14+APAC, ComponentLink3URL=https://datasheet.octopart.com:443/RC0603FR-070RL-Yageo-datasheet-8328172.pdf?src-supplier=element14+APAC, ComponentLink4Description=https://datasheet.octopart.com:443/RC0603FR-070RL-Yageo-datasheet-34211833.pdf?src-supplier=Newark, ComponentLink4URL=https://datasheet.octopart.com:443/RC0603FR-070RL-Yageo-datasheet-34211833.pdf?src-supplier=Newark, ComponentLink5Description=https://datasheet.octopart.com:443/RC0603FR-070RL-Yageo-Group-datasheet-176638170.pdf?src-supplier=Future+Electronics, ComponentLink5URL=https://datasheet.octopart.com:443/RC0603FR-070RL-Yageo-Group-datasheet-176638170.pdf?src-supplier=Future+Electronics, ComponentLink6Description=https://datasheet.octopart.com:443/RC0603FR-070RL-Yageo-datasheet-164759695.pdf?src-supplier=Future+Electronics, ComponentLink6URL=https://datasheet.octopart.com:443/RC0603FR-070RL-Yageo-datasheet-164759695.pdf?src-supplier=Future+Electronics, ComponentLink7Description=https://datasheet.octopart.com:443/RC0603FR-070RL-Yageo-datasheet-137700087.pdf?src-supplier=Future+Electronics, ComponentLink7URL=https://datasheet.octopart.com:443/RC0603FR-070RL-Yageo-datasheet-137700087.pdf?src-supplier=Future+Electronics, ComponentLink8Description=https://datasheet.octopart.com:443/RC0603FR-070RL-Yageo-datasheet-15599030.pdf?src-supplier=Future+Electronics, ComponentLink8URL=https://datasheet.octopart.com:443/RC0603FR-070RL-Yageo-datasheet-15599030.pdf?src-supplier=Future+Electronics, ComponentLink9Description=https://datasheet.octopart.com:443/RC0603FR-070RL-Yageo-datasheet-12596169.pdf?src-supplier=Future+Electronics, ComponentLink9URL=https://datasheet.octopart.com:443/RC0603FR-070RL-Yageo-datasheet-12596169.pdf?src-supplier=Future+Electronics, ComponentLink10Description=https://datasheet.octopart.com/RC0603FR-070RL-Yageo-datasheet-73766026.pdf, ComponentLink10URL=https://datasheet.octopart.com/RC0603FR-070RL-Yageo-datasheet-73766026.pdf, ComponentLink11Description=http://sigma.octopart.com:80/conflict_mineral_statement/Yageo-company-3.pdf?src-supplier=Compliance+Statements, ComponentLink11URL=http://sigma.octopart.com:80/conflict_mineral_statement/Yageo-company-3.pdf?src-supplier=Compliance+Statements, ComponentLink12Description=http://sigma.octopart.com:80/rohs_statement/Yageo-company-2.pdf?src-supplier=Compliance+Statements, ComponentLink12URL=http://sigma.octopart.com:80/rohs_statement/Yageo-company-2.pdf?src-supplier=Compliance+Statements, Composition="Thick Film", Contact Plating=Tin, Depth=800µm, Features="Moisture Resistant", Height=450µm, Lead Free="Lead Free", Length=1.6mm, Lifecycle Status=Production, Manufacturer Part Number=RC0603FR-070RL, Military Standard=Not, Mounting Technology="Surface Mount", Number of Terminals=2, Number of Terminations=2, Packaging="Tape & Reel", Pins=2, Power Rating=100mW, Pricing="1=0.101, 25=0.009, 100=0.008, 250=0.007, 500=0.006, 1000=0.005, 2500=0.004 (USD)", Radiation Hardening=No, REACH SVHC=Unaffected, RoHS=Compliant, Schedule B="8533210045, 8533210045|8533210045|8533210045|8533210045|8533210045", Stock=190618, Supplier=Avnet, Supplier Part Number=RC0603FR-070RL, Termination=SMD/SMT, Width=800µm, Working Voltage=75V